# Altium PCB SensorLDR_PCB2.PcbDoc
Units mm, origin at the board's own origin, x right, y up, seen from the top; angles counter-clockwise.
Board outline 122.05 x 61.21 mm, 2 copper layers (Top Layer, Bottom Layer); 21 components, 12 nets, 58 pads, 0 vias.
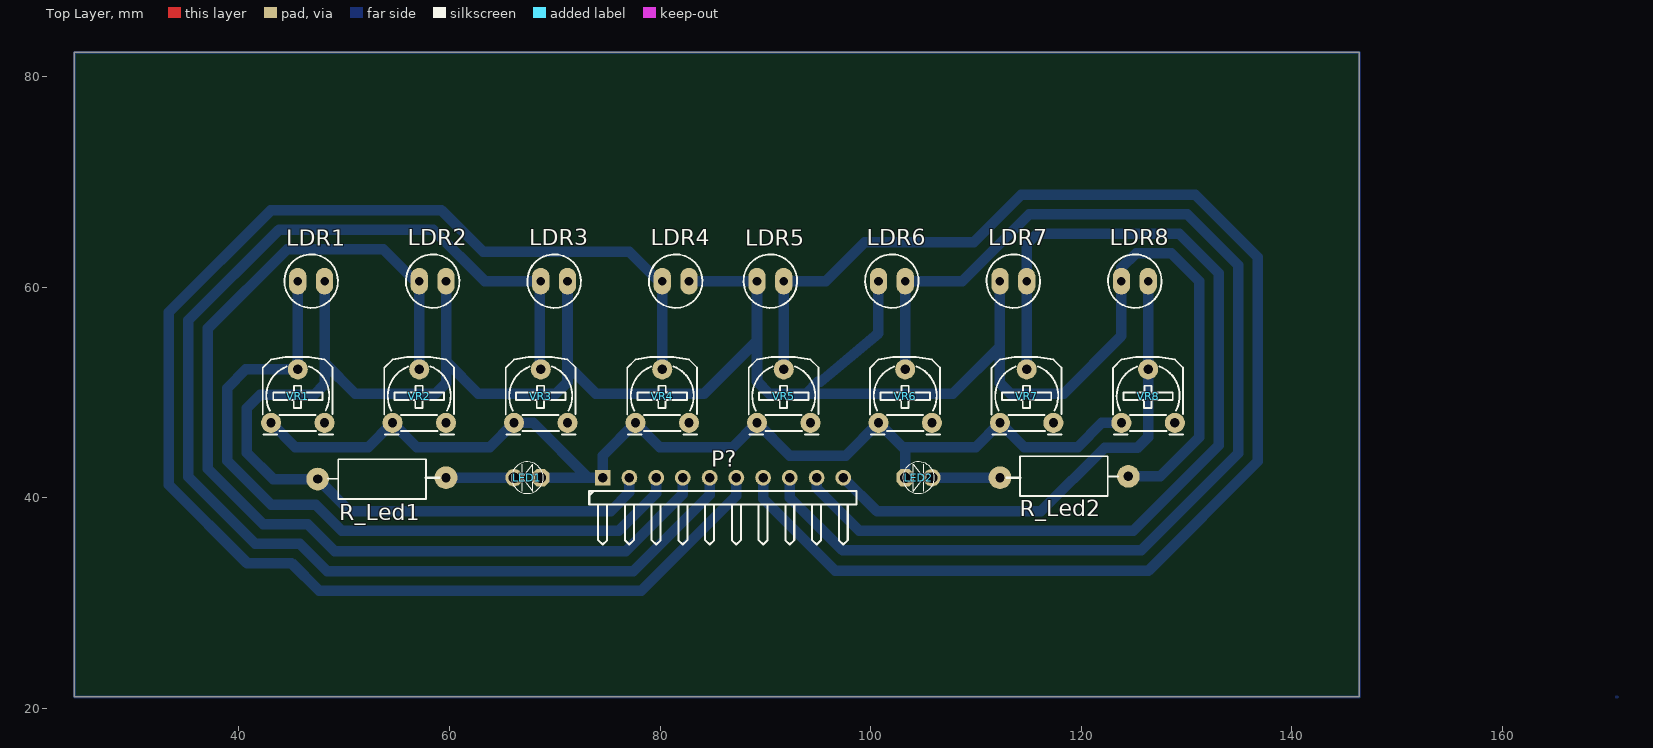
[diagram p0: Top Layer view]
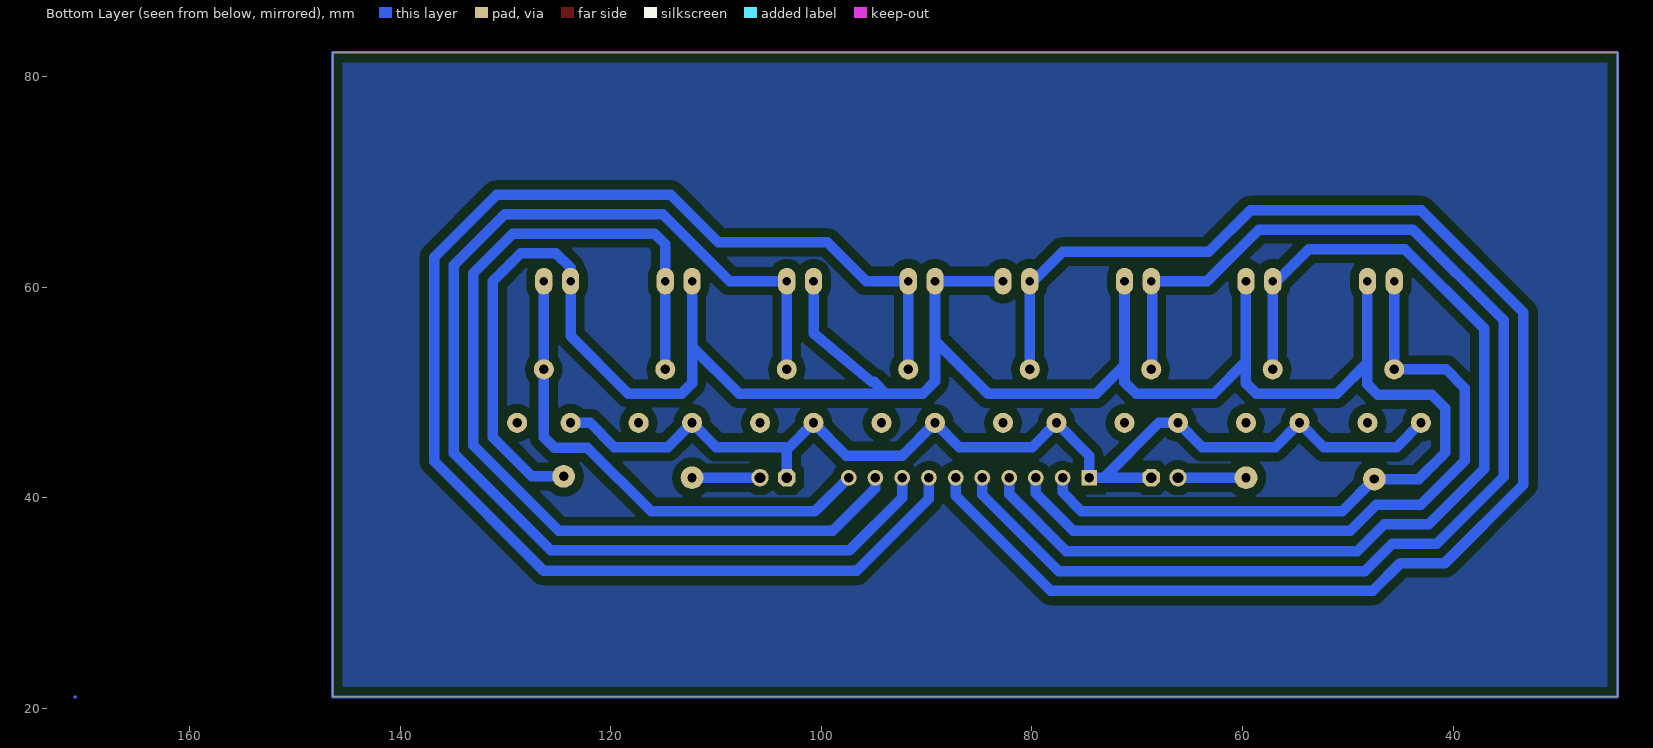
[diagram p1: Bottom Layer view, seen from below]
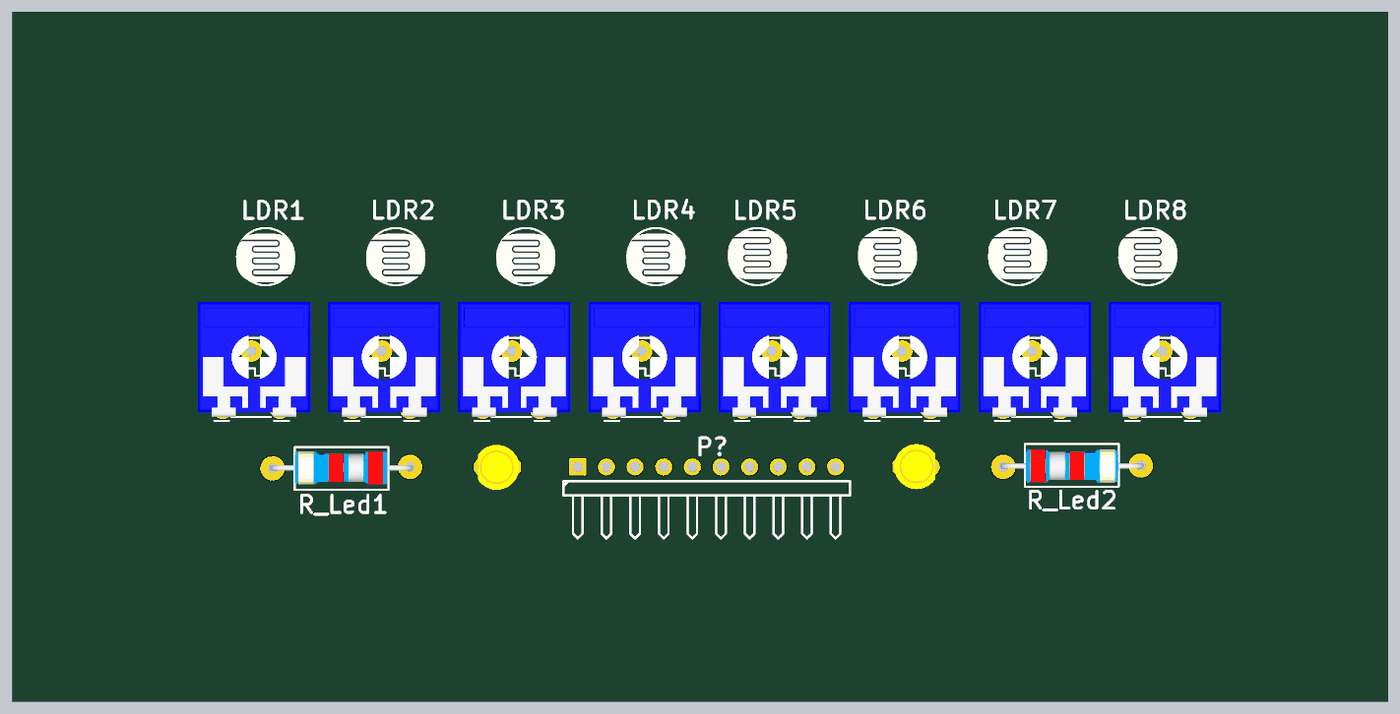
[diagram p2: 3D render of the assembled board from above, using the file's embedded part models]

## Layer stack, top to bottom
Top Solder: solder mask 0.0102, Solder Resist, Dk 3.5
Top Layer: signal copper 0.0356
Dielectric 1: dielectric 0.32, FR-4, Dk 4.8
Bottom Layer: signal copper 0.0356
Bottom Solder: solder mask 0.0102, Solder Resist, Dk 3.5

## Board outline
24.384,21.082 24.384,82.296 146.431,82.296 146.431,21.082

## Design rules (kind name [scope] priority, off if disabled: settings)
Clearance [All] p1: gap=0.85 ignorepadtopadclearanceinfootprint=FALSE
DiffPairsRouting [All] p1: maxlimit=3 minlimit=3 mostfreqgap=3 toplayer_minwidth=0.381 toplayer_maxwidth=0.381 toplayer_prefwidth=0.381 bottomlayer_minwidth=0.381 bottomlayer_maxwidth=0.381 bottomlayer_prefwidth=0.381 maxuncoupledlength=12.7
PolygonConnect [All] p1: connectstyle=Relief reliefconductorwidth=0.254 reliefentries=4 polygonreliefangle="90 Angle" airgapwidth=0.254
RoutingLayers [All] p1: top layer_v5=FALSE bottom layer_v5=TRUE
RoutingVias [All] p1: holewidth=0.711 width=1.27 viastyle="Through Hole" minholewidth=0.711 minwidth=1.27 maxholewidth=0.711 maxwidth=1.27
SolderMaskExpansion [All] p1: expansion=0.102
Width Others [All] p1: maxlimit=1 minlimit=1 preferedwidth=1
Width VCC [InNet('VCC')] p2: maxlimit=1 minlimit=1 preferedwidth=1
Width GND [InNet('GND')] p3: maxlimit=1 minlimit=1 preferedwidth=1
28 further rules are at their usual default settings.

## Components (designator, comment, footprint, x,y, rotation, side; value= is the part's Value field where it differs from the comment)
LDR1 "LDR" CDS 48.133,60.579 r180 top
LDR2 "LDR" CDS 59.672,60.579 r180 top
LDR3 "LDR" CDS 71.211,60.579 r180 top
LDR4 "LDR" CDS 82.75,60.579 r180 top
LDR5 "LDR" CDS 89.208,60.579 r0 top
LDR6 "LDR" CDS 100.747,60.579 r0 top
LDR7 "LDR" CDS 112.286,60.579 r0 top
LDR8 "LDR" CDS 123.825,60.579 r0 top
LED1 "LED" LED-3MM-YELLOW 68.671,41.91 r180 top value="LED 3 ly Single Colour"
LED2 "LED" LED-3MM-YELLOW 103.287,41.91 r0 top value="LED 3 ly Single Colour"
P? "Header 10H" HDR1X10H 74.549,41.91 r0 top
R_Led1 "Res" RES-1/2W 54.084,41.783 r180 top
R_Led2 "Res" RES-1/2W 117.874,42.037 r0 top
VR1 "50K" VR-S2 43.053,47.117 r0 top value="Volume 50k"
VR2 "50K" VR-S2 54.592,47.117 r0 top value="Volume 50k"
VR3 "50K" VR-S2 66.131,47.117 r0 top value="Volume 50k"
VR4 "50K" VR-S2 77.67,47.117 r0 top value="Volume 50k"
VR5 "50K" VR-S2 89.208,47.117 r0 top value="Volume 50k"
VR6 "50K" VR-S2 100.747,47.117 r0 top value="Volume 50k"
VR7 "50K" VR-S2 112.286,47.117 r0 top value="Volume 50k"
VR8 "50K" VR-S2 123.825,47.117 r0 top value="Volume 50k"

## Footprints (in the part's own frame and the unit in brackets; to place one, negate y for a bottom-side part, rotate by r counter-clockwise, add the part's x,y. Pads: shape width x height; smd on the part's side, far side on the other; paste and mask are expansions set on the pad)
CDS [mil] "QUANG TRO"
  oval 65x100 hole 32: 1(0,0) 2(100,0)
  silkscreen extent -50,-100 150,100, body extent -53,-80 153,89, height 138
HDR1X10H [mm] "Connector; Header; 10 Position; Right Angle"
  rect 1.5x1.5 hole 0.9: 1(0,0)
  round 1.5 hole 0.9: 2(2.54,0) 3(5.08,0) 4(7.62,0) 5(10.16,0) 6(12.7,0) 7(15.24,0) 8(17.78,0) 9(20.32,0) 10(22.86,0)
  silkscreen extent -1.27,-6.35 24.13,-1.27
LED-3MM-YELLOW [mil]
  oct 65x65 hole 40: 1(0,0)
  round 65 hole 40: 2(100,0)
  silkscreen extent -9,-59 109,59, body extent -27,-77 117,80, height 181
RES-1/2W [mil]
  round 85 hole 35: 1(-220,-5) 2(260,0)
  silkscreen extent -195,-74 221,75, body extent -230,-60 270,56, height 121
VR-S2 [mil] "Resistor Variable"
  round 75 hole 35: 1(0,0) 2(100,200) 3(200,0)
  silkscreen extent -31,-44 231,246, body extent -87,-30 307,372, height 165

## Part data
LDR1 LDR2 LDR3 LDR4 LDR5 LDR6 LDR7 LDR8: "Quang Tro"
LED1 LED2: "LED Single colour Green and Red"
P?: "Header, 10-Pin, Right Angle", LatestRevisionDate=17-Jul-2002, LatestRevisionNote="Re-released for DXP Platform.", Publisher="Altium Limited"
R_Led1 R_Led2: Manufacturer="Generic Components", Class=Passive, Published=08/06/2000, Publisher="Altium Hobart Technology Centre", SubClass=R
VR1 VR2 VR3 VR4 VR5 VR6 VR7 VR8: library part VR-S, "Var Resistor"

## Nets (pads, with @x,y where several pads share a name; then routed paths per layer and width w, separated by ;. In a path a pad name is that pad's centre, name@x,y a point inside that pad or via, vN(x,y) a via of type N, cw(c..) or ccw(c..) an arc to the next point about the centre after c; other vN are vias at no path point)
GND: LDR1.1 LDR2.1 LDR3.1 LDR4.1 LDR5.1 LDR6.1 LDR7.1 LDR8.1 P?.2 R_Led1.2 R_Led2.2 | length 248.3
  Bottom Layer w1: LDR1.1 48.133,52.807 ; LDR2.1 59.672,52.959 ; LDR3.1@71.422,60.356 LDR3.1 71.211,52.589 ; P?.2 77.089,40.513 75.311,38.735 50.528,38.735 R_Led1.2 43.256,41.783 40.742,44.298 40.742,48.489 42.037,49.784 47.142,49.784 48.133,50.775 48.133,52.807 ; LDR4.1 LDR5.1 89.208,54.918 ; LDR6.1 100.747,55.626 95.216,51.003 94.996,51.003 93.878,49.886 ; LDR7.1 112.286,54.356 ; R_Led2.2 127.508,42.037 131.216,45.745 131.216,60.579 128.549,63.246 125.222,63.246 123.825,61.849 LDR8.1 123.825,55.372 118.347,49.894 113.284,49.894 112.286,50.892 112.286,54.356 ; 48.133,52.807 51.054,49.886 58.674,49.886 59.672,50.883 59.672,52.959 ; 59.672,52.959 62.745,49.886 70.104,49.886 71.211,50.992 71.211,52.589 ; 71.211,52.589 73.914,49.886 84.176,49.886 89.208,54.918 ; 89.208,54.918 89.208,51.054 90.377,49.886 93.878,49.886 ; 93.878,49.886 107.816,49.886 112.286,54.356
NetLED1_2: LED1.2 R_Led1.1 | length 6.5
  Bottom Layer w1: R_Led1.1 LED1.2
NetLED2_2: LED2.2 R_Led2.1 | length 6.5
  Bottom Layer w1: LED2.2 R_Led2.1
S1: LDR1.2 P?.3 VR1.2 | length 69.1
  Bottom Layer w1: LDR1.2 VR1.2 40.665,52.197 38.887,50.419 38.887,43.536 43.07,39.353 47.293,39.353 49.762,36.885 76.077,36.885 79.629,40.437 P?.3
S2: LDR2.2 P?.4 VR2.2 | length 98.4
  Bottom Layer w1: VR2.2 LDR2.2 56.769,60.579 53.721,63.627 44.577,63.627 37.033,56.083 37.033,42.774 42.303,37.503 46.527,37.503 49.105,34.925 76.734,34.925 82.169,40.36 P?.4
S3: LDR3.2 P?.5 VR3.2 | length 120.3
  Bottom Layer w1: VR3.2 68.591,52.277 68.591,60.499 LDR3.2 63.373,60.579 58.475,65.477 43.811,65.477 35.179,56.845 35.179,42.011 41.537,35.653 45.76,35.653 48.394,33.02 77.445,33.02 84.709,40.284 P?.5
S4: LDR4.2 P?.6 VR4.2 | length 142
  Bottom Layer w1: VR4.2 LDR4.2 79.883,60.579 77.089,63.373 63.195,63.373 59.241,67.327 43.044,67.327 33.329,57.612 33.329,41.245 40.771,33.803 44.994,33.803 47.628,31.17 78.211,31.17 87.249,40.208 P?.6
S5: LDR5.2 P?.7 VR5.2 | length 134.8
  Bottom Layer w1: P?.7 89.789,39.929 96.647,33.071 126.391,33.071 136.779,43.459 136.779,62.865 130.848,68.796 114.313,68.796 109.779,64.262 99.441,64.262 95.758,60.579 LDR5.2 VR5.2
S6: LDR6.2 P?.8 VR6.2 | length 112.9
  Bottom Layer w1: P?.8 92.329,40.005 97.333,35.001 125.705,35.001 134.925,44.221 134.925,62.103 130.082,66.946 115.079,66.946 108.712,60.579 LDR6.2 VR6.2
S7: LDR7.2 P?.9 VR7.2 | length 92.7
  Bottom Layer w1: P?.9 94.869,40.911 98.921,36.86 124.947,36.86 133.066,44.979 133.066,61.345 129.316,65.096 115.845,65.096 114.826,64.077 LDR7.2 VR7.2
S8: LDR8.2 P?.10 VR8.2 | length 48
  Bottom Layer w1: P?.10 100.609,38.71 116.18,38.71 122.225,44.755 125.349,44.755 126.365,45.771 VR8.2 LDR8.2
VCC: LED1.1 LED2.1 P?.1 VR1.1 VR2.1 VR3.1 VR4.1 VR5.1 VR6.1 VR7.1 VR8.1 | length 105.9
  Bottom Layer w1: VR1.1 45.364,44.806 52.28,44.806 VR2.1 56.903,44.806 63.819,44.806 VR3.1 67.954,47.117 73.161,41.91 ; LED1.1 73.161,41.91 ; LED2.1 103.287,44.577 103.059,44.806 ; VR8.1 121.971,47.117 119.669,44.814 114.589,44.814 VR7.1 109.975,44.806 103.059,44.806 ; 73.161,41.91 P?.1 74.549,43.996 VR4.1 79.981,44.806 86.897,44.806 VR5.1 92.315,44.01 97.64,44.01 VR6.1 103.059,44.806
pads on no net: VR1.3 VR2.3 VR3.3 VR4.3 VR5.3 VR6.3 VR7.3 VR8.3
copper on no net: | length 366.6
  Bottom Layer w0.254: 170.815,21.082 170.942,21.082 ; 24.384,21.082 146.431,21.082 146.431,82.296 24.384,82.296 24.384,21.082

## Polygon pours and split planes (outlines as drawn)
no net on Bottom Layer (solid, pour order 34): 24.384,82.296 24.384,21.336 146.431,21.336 146.431,82.296
no net on Bottom Layer "Bottom Layer-No Net 2" (solid, pour order 22): 7.366,68.453
no net on Bottom Layer "Bottom Layer-No Net" (solid, pour order 10): 30.353,68.834